# EAGLE board 10x8 (EAGLE 9.6.2), part 1 of 5

Size 99.06 x 83.82 mm. Coordinates in mm from the lower left corner, seen from the top.
Outline: 0,0 99.06,0 99.06,83.82 0,83.82 0,0
Copper layers (1*16): Top 0.035mm / dielectric 1.5mm / Bottom 0.035mm
Design rules "default": minimum track width 6mil, minimum drill 0.35mm, track to track 6mil, track to pad 6mil, pad to pad 6mil, via to via 6mil, smd to smd 6mil, copper to edge 40mil, drill to drill 6mil, minimum pad ring 10mil, minimum via ring 8mil, stop-mask expansion 4mil, vias tented up to drill 0mil, thermal gap 10mil

## Footprints (pad centres in the part's own frame; a part is rotated, then mirrored left to right if it is on the bottom)
PROTOPAD-THT = drill 0.8 pad 1.4: P1 0,0

## Placement (x,y rotation side)
U$1  [PROTOPAD-BETWEEN]  2.54,1.27 90 top
U$2  [PROTOPAD-CENTER]  3.81,1.27 0 top
U$3  [PROTOPAD-BETWEEN]  5.08,1.27 90 top
U$4  [PROTOPAD-CENTER]  6.35,1.27 0 top
U$5  PROTOPADTHT  [PROTOPAD-THT]  2.54,2.54 0 top
U$6  [PROTOPAD-BETWEEN]  3.81,2.54 0 top
U$7  [PROTOPAD-BETWEEN]  2.54,3.81 90 top
U$8  [PROTOPAD-CENTER]  3.81,3.81 0 top
U$9  PROTOPADTHT  [PROTOPAD-THT]  5.08,2.54 0 top
U$10  [PROTOPAD-BETWEEN]  6.35,2.54 0 top
U$11  [PROTOPAD-BETWEEN]  5.08,3.81 90 top
U$12  [PROTOPAD-CENTER]  6.35,3.81 0 top
U$13  PROTOPADTHT  [PROTOPAD-THT]  2.54,5.08 0 top
U$14  [PROTOPAD-BETWEEN]  3.81,5.08 0 top
U$15  [PROTOPAD-BETWEEN]  2.54,6.35 90 top
U$16  [PROTOPAD-CENTER]  3.81,6.35 0 top
U$17  PROTOPADTHT  [PROTOPAD-THT]  5.08,5.08 0 top
U$18  [PROTOPAD-BETWEEN]  6.35,5.08 0 top
U$19  [PROTOPAD-BETWEEN]  5.08,6.35 90 top
U$20  [PROTOPAD-CENTER]  6.35,6.35 0 top
U$21  [PROTOPAD-BETWEEN]  7.62,1.27 90 top
U$22  [PROTOPAD-CENTER]  8.89,1.27 0 top
U$23  [PROTOPAD-BETWEEN]  10.16,1.27 90 top
U$24  [PROTOPAD-CENTER]  11.43,1.27 0 top
U$25  [PROTOPAD-BETWEEN]  12.7,1.27 90 top
U$26  [PROTOPAD-CENTER]  13.97,1.27 0 top
U$27  [PROTOPAD-BETWEEN]  15.24,1.27 90 top
U$28  [PROTOPAD-CENTER]  16.51,1.27 0 top
U$29  [PROTOPAD-BETWEEN]  17.78,1.27 90 top
U$30  [PROTOPAD-CENTER]  19.05,1.27 0 top
U$31  [PROTOPAD-BETWEEN]  20.32,1.27 90 top
U$32  [PROTOPAD-CENTER]  21.59,1.27 0 top
U$33  PROTOPADTHT  [PROTOPAD-THT]  7.62,2.54 0 top
U$34  [PROTOPAD-BETWEEN]  8.89,2.54 0 top
U$35  [PROTOPAD-BETWEEN]  7.62,3.81 90 top
U$36  [PROTOPAD-CENTER]  8.89,3.81 0 top
U$37  PROTOPADTHT  [PROTOPAD-THT]  10.16,2.54 0 top
U$38  [PROTOPAD-BETWEEN]  11.43,2.54 0 top
U$39  [PROTOPAD-BETWEEN]  10.16,3.81 90 top
U$40  [PROTOPAD-CENTER]  11.43,3.81 0 top
U$41  PROTOPADTHT  [PROTOPAD-THT]  7.62,5.08 0 top
U$42  [PROTOPAD-BETWEEN]  8.89,5.08 0 top
U$43  [PROTOPAD-BETWEEN]  7.62,6.35 90 top
U$44  [PROTOPAD-CENTER]  8.89,6.35 0 top
U$45  PROTOPADTHT  [PROTOPAD-THT]  10.16,5.08 0 top
U$46  [PROTOPAD-BETWEEN]  11.43,5.08 0 top
U$47  [PROTOPAD-BETWEEN]  10.16,6.35 90 top
U$48  [PROTOPAD-CENTER]  11.43,6.35 0 top
U$49  PROTOPADTHT  [PROTOPAD-THT]  2.54,7.62 0 top
U$50  [PROTOPAD-BETWEEN]  3.81,7.62 0 top
U$51  [PROTOPAD-BETWEEN]  2.54,8.89 90 top
U$52  [PROTOPAD-CENTER]  3.81,8.89 0 top
U$53  PROTOPADTHT  [PROTOPAD-THT]  5.08,7.62 0 top
U$54  [PROTOPAD-BETWEEN]  6.35,7.62 0 top
U$55  [PROTOPAD-BETWEEN]  5.08,8.89 90 top
U$56  [PROTOPAD-CENTER]  6.35,8.89 0 top
U$57  PROTOPADTHT  [PROTOPAD-THT]  2.54,10.16 0 top
U$58  [PROTOPAD-BETWEEN]  3.81,10.16 0 top
U$59  [PROTOPAD-BETWEEN]  2.54,11.43 90 top
U$60  [PROTOPAD-CENTER]  3.81,11.43 0 top
U$61  PROTOPADTHT  [PROTOPAD-THT]  5.08,10.16 0 top
U$62  [PROTOPAD-BETWEEN]  6.35,10.16 0 top
U$63  [PROTOPAD-BETWEEN]  5.08,11.43 90 top
U$64  [PROTOPAD-CENTER]  6.35,11.43 0 top
U$65  PROTOPADTHT  [PROTOPAD-THT]  93.98,2.54 0 top
U$66  [PROTOPAD-BETWEEN]  95.25,2.54 0 top
U$67  [PROTOPAD-BETWEEN]  93.98,3.81 90 top
U$68  [PROTOPAD-CENTER]  95.25,3.81 0 top
U$69  PROTOPADTHT  [PROTOPAD-THT]  96.52,2.54 0 top
U$70  [PROTOPAD-BETWEEN]  97.79,2.54 0 top
U$71  [PROTOPAD-BETWEEN]  96.52,3.81 90 top
U$72  [PROTOPAD-CENTER]  97.79,3.81 0 top
U$73  PROTOPADTHT  [PROTOPAD-THT]  93.98,5.08 0 top
U$74  [PROTOPAD-BETWEEN]  95.25,5.08 0 top
U$75  [PROTOPAD-BETWEEN]  93.98,6.35 90 top
U$76  [PROTOPAD-CENTER]  95.25,6.35 0 top
U$77  PROTOPADTHT  [PROTOPAD-THT]  96.52,5.08 0 top
U$78  [PROTOPAD-BETWEEN]  97.79,5.08 0 top
U$79  [PROTOPAD-BETWEEN]  96.52,6.35 90 top
U$80  [PROTOPAD-CENTER]  97.79,6.35 0 top
U$81  PROTOPADTHT  [PROTOPAD-THT]  7.62,7.62 0 top
U$82  [PROTOPAD-BETWEEN]  8.89,7.62 0 top
U$83  [PROTOPAD-BETWEEN]  7.62,8.89 90 top
U$84  [PROTOPAD-CENTER]  8.89,8.89 0 top
U$85  PROTOPADTHT  [PROTOPAD-THT]  10.16,7.62 0 top
U$86  [PROTOPAD-BETWEEN]  11.43,7.62 0 top
U$87  [PROTOPAD-BETWEEN]  10.16,8.89 90 top
U$88  [PROTOPAD-CENTER]  11.43,8.89 0 top
U$89  PROTOPADTHT  [PROTOPAD-THT]  7.62,10.16 0 top
U$90  [PROTOPAD-BETWEEN]  8.89,10.16 0 top
U$91  [PROTOPAD-BETWEEN]  7.62,11.43 90 top
U$92  [PROTOPAD-CENTER]  8.89,11.43 0 top
U$93  PROTOPADTHT  [PROTOPAD-THT]  10.16,10.16 0 top
U$94  [PROTOPAD-BETWEEN]  11.43,10.16 0 top
U$95  [PROTOPAD-BETWEEN]  10.16,11.43 90 top
U$96  [PROTOPAD-CENTER]  11.43,11.43 0 top
U$97  [PROTOPAD-BETWEEN]  22.86,1.27 90 top
U$98  [PROTOPAD-CENTER]  24.13,1.27 0 top
U$99  [PROTOPAD-BETWEEN]  25.4,1.27 90 top
U$100  [PROTOPAD-CENTER]  26.67,1.27 0 top
U$101  [PROTOPAD-BETWEEN]  27.94,1.27 90 top
U$102  [PROTOPAD-CENTER]  29.21,1.27 0 top
U$103  [PROTOPAD-BETWEEN]  30.48,1.27 90 top
U$104  [PROTOPAD-CENTER]  31.75,1.27 0 top
U$105  [PROTOPAD-BETWEEN]  33.02,1.27 90 top
U$106  [PROTOPAD-CENTER]  34.29,1.27 0 top
U$107  [PROTOPAD-BETWEEN]  35.56,1.27 90 top
U$108  [PROTOPAD-CENTER]  36.83,1.27 0 top
U$109  [PROTOPAD-BETWEEN]  38.1,1.27 90 top
U$110  [PROTOPAD-CENTER]  39.37,1.27 0 top
U$111  [PROTOPAD-BETWEEN]  40.64,1.27 90 top
U$112  [PROTOPAD-CENTER]  41.91,1.27 0 top
U$113  [PROTOPAD-BETWEEN]  43.18,1.27 90 top
U$114  [PROTOPAD-CENTER]  44.45,1.27 0 top
U$115  [PROTOPAD-BETWEEN]  45.72,1.27 90 top
U$116  [PROTOPAD-CENTER]  46.99,1.27 0 top
U$117  [PROTOPAD-BETWEEN]  48.26,1.27 90 top
U$118  [PROTOPAD-CENTER]  49.53,1.27 0 top
U$119  [PROTOPAD-BETWEEN]  50.8,1.27 90 top
U$120  [PROTOPAD-CENTER]  52.07,1.27 0 top
U$121  [PROTOPAD-BETWEEN]  53.34,1.27 90 top
U$122  [PROTOPAD-CENTER]  54.61,1.27 0 top
U$123  [PROTOPAD-BETWEEN]  55.88,1.27 90 top
U$124  [PROTOPAD-CENTER]  57.15,1.27 0 top
U$125  [PROTOPAD-BETWEEN]  58.42,1.27 90 top
U$126  [PROTOPAD-CENTER]  59.69,1.27 0 top
U$127  [PROTOPAD-BETWEEN]  60.96,1.27 90 top
U$128  [PROTOPAD-CENTER]  62.23,1.27 0 top
U$129  PROTOPADTHT  [PROTOPAD-THT]  12.7,2.54 0 top
U$130  [PROTOPAD-BETWEEN]  13.97,2.54 0 top
U$131  [PROTOPAD-BETWEEN]  12.7,3.81 90 top
U$132  [PROTOPAD-CENTER]  13.97,3.81 0 top
U$133  PROTOPADTHT  [PROTOPAD-THT]  15.24,2.54 0 top
U$134  [PROTOPAD-BETWEEN]  16.51,2.54 0 top
U$135  [PROTOPAD-BETWEEN]  15.24,3.81 90 top
U$136  [PROTOPAD-CENTER]  16.51,3.81 0 top
U$137  PROTOPADTHT  [PROTOPAD-THT]  12.7,5.08 0 top
U$138  [PROTOPAD-BETWEEN]  13.97,5.08 0 top
U$139  [PROTOPAD-BETWEEN]  12.7,6.35 90 top
U$140  [PROTOPAD-CENTER]  13.97,6.35 0 top
U$141  PROTOPADTHT  [PROTOPAD-THT]  15.24,5.08 0 top
U$142  [PROTOPAD-BETWEEN]  16.51,5.08 0 top
U$143  [PROTOPAD-BETWEEN]  15.24,6.35 90 top
U$144  [PROTOPAD-CENTER]  16.51,6.35 0 top
U$145  PROTOPADTHT  [PROTOPAD-THT]  17.78,2.54 0 top
U$146  [PROTOPAD-BETWEEN]  19.05,2.54 0 top
U$147  [PROTOPAD-BETWEEN]  17.78,3.81 90 top
U$148  [PROTOPAD-CENTER]  19.05,3.81 0 top
U$149  PROTOPADTHT  [PROTOPAD-THT]  20.32,2.54 0 top
U$150  [PROTOPAD-BETWEEN]  21.59,2.54 0 top
U$151  [PROTOPAD-BETWEEN]  20.32,3.81 90 top
U$152  [PROTOPAD-CENTER]  21.59,3.81 0 top
U$153  PROTOPADTHT  [PROTOPAD-THT]  17.78,5.08 0 top
U$154  [PROTOPAD-BETWEEN]  19.05,5.08 0 top
U$155  [PROTOPAD-BETWEEN]  17.78,6.35 90 top
U$156  [PROTOPAD-CENTER]  19.05,6.35 0 top
U$157  PROTOPADTHT  [PROTOPAD-THT]  20.32,5.08 0 top
U$158  [PROTOPAD-BETWEEN]  21.59,5.08 0 top
U$159  [PROTOPAD-BETWEEN]  20.32,6.35 90 top
U$160  [PROTOPAD-CENTER]  21.59,6.35 0 top
U$161  PROTOPADTHT  [PROTOPAD-THT]  12.7,7.62 0 top
U$162  [PROTOPAD-BETWEEN]  13.97,7.62 0 top
U$163  [PROTOPAD-BETWEEN]  12.7,8.89 90 top
U$164  [PROTOPAD-CENTER]  13.97,8.89 0 top
U$165  PROTOPADTHT  [PROTOPAD-THT]  15.24,7.62 0 top
U$166  [PROTOPAD-BETWEEN]  16.51,7.62 0 top
U$167  [PROTOPAD-BETWEEN]  15.24,8.89 90 top
U$168  [PROTOPAD-CENTER]  16.51,8.89 0 top
U$169  PROTOPADTHT  [PROTOPAD-THT]  12.7,10.16 0 top
U$170  [PROTOPAD-BETWEEN]  13.97,10.16 0 top
U$171  [PROTOPAD-BETWEEN]  12.7,11.43 90 top
U$172  [PROTOPAD-CENTER]  13.97,11.43 0 top
U$173  PROTOPADTHT  [PROTOPAD-THT]  15.24,10.16 0 top
U$174  [PROTOPAD-BETWEEN]  16.51,10.16 0 top
U$175  [PROTOPAD-BETWEEN]  15.24,11.43 90 top
U$176  [PROTOPAD-CENTER]  16.51,11.43 0 top
U$177  PROTOPADTHT  [PROTOPAD-THT]  17.78,7.62 0 top
U$178  [PROTOPAD-BETWEEN]  19.05,7.62 0 top
U$179  [PROTOPAD-BETWEEN]  17.78,8.89 90 top
U$180  [PROTOPAD-CENTER]  19.05,8.89 0 top
U$181  PROTOPADTHT  [PROTOPAD-THT]  20.32,7.62 0 top
U$182  [PROTOPAD-BETWEEN]  21.59,7.62 0 top
U$183  [PROTOPAD-BETWEEN]  20.32,8.89 90 top
U$184  [PROTOPAD-CENTER]  21.59,8.89 0 top
U$185  PROTOPADTHT  [PROTOPAD-THT]  17.78,10.16 0 top
U$186  [PROTOPAD-BETWEEN]  19.05,10.16 0 top
U$187  [PROTOPAD-BETWEEN]  17.78,11.43 90 top
U$188  [PROTOPAD-CENTER]  19.05,11.43 0 top
U$189  PROTOPADTHT  [PROTOPAD-THT]  20.32,10.16 0 top
U$190  [PROTOPAD-BETWEEN]  21.59,10.16 0 top
U$191  [PROTOPAD-BETWEEN]  20.32,11.43 90 top
U$192  [PROTOPAD-CENTER]  21.59,11.43 0 top
U$193  PROTOPADTHT  [PROTOPAD-THT]  2.54,12.7 0 top
U$194  [PROTOPAD-BETWEEN]  3.81,12.7 0 top
U$195  [PROTOPAD-BETWEEN]  2.54,13.97 90 top
U$196  [PROTOPAD-CENTER]  3.81,13.97 0 top
U$197  PROTOPADTHT  [PROTOPAD-THT]  5.08,12.7 0 top
U$198  [PROTOPAD-BETWEEN]  6.35,12.7 0 top
U$199  [PROTOPAD-BETWEEN]  5.08,13.97 90 top
U$200  [PROTOPAD-CENTER]  6.35,13.97 0 top
U$201  PROTOPADTHT  [PROTOPAD-THT]  2.54,15.24 0 top
U$202  [PROTOPAD-BETWEEN]  3.81,15.24 0 top
U$203  [PROTOPAD-BETWEEN]  2.54,16.51 90 top
U$204  [PROTOPAD-CENTER]  3.81,16.51 0 top
U$205  PROTOPADTHT  [PROTOPAD-THT]  5.08,15.24 0 top
U$206  [PROTOPAD-BETWEEN]  6.35,15.24 0 top
U$207  [PROTOPAD-BETWEEN]  5.08,16.51 90 top
U$208  [PROTOPAD-CENTER]  6.35,16.51 0 top
U$209  PROTOPADTHT  [PROTOPAD-THT]  7.62,12.7 0 top
U$210  [PROTOPAD-BETWEEN]  8.89,12.7 0 top
U$211  [PROTOPAD-BETWEEN]  7.62,13.97 90 top
U$212  [PROTOPAD-CENTER]  8.89,13.97 0 top
U$213  PROTOPADTHT  [PROTOPAD-THT]  10.16,12.7 0 top
U$214  [PROTOPAD-BETWEEN]  11.43,12.7 0 top
U$215  [PROTOPAD-BETWEEN]  10.16,13.97 90 top
U$216  [PROTOPAD-CENTER]  11.43,13.97 0 top
U$217  PROTOPADTHT  [PROTOPAD-THT]  7.62,15.24 0 top
U$218  [PROTOPAD-BETWEEN]  8.89,15.24 0 top
U$219  [PROTOPAD-BETWEEN]  7.62,16.51 90 top
U$220  [PROTOPAD-CENTER]  8.89,16.51 0 top
U$221  PROTOPADTHT  [PROTOPAD-THT]  10.16,15.24 0 top
U$222  [PROTOPAD-BETWEEN]  11.43,15.24 0 top
U$223  [PROTOPAD-BETWEEN]  10.16,16.51 90 top
U$224  [PROTOPAD-CENTER]  11.43,16.51 0 top
U$225  PROTOPADTHT  [PROTOPAD-THT]  2.54,17.78 0 top
U$226  [PROTOPAD-BETWEEN]  3.81,17.78 0 top
U$227  [PROTOPAD-BETWEEN]  2.54,19.05 90 top
U$228  [PROTOPAD-CENTER]  3.81,19.05 0 top
U$229  PROTOPADTHT  [PROTOPAD-THT]  5.08,17.78 0 top
U$230  [PROTOPAD-BETWEEN]  6.35,17.78 0 top
U$231  [PROTOPAD-BETWEEN]  5.08,19.05 90 top
U$232  [PROTOPAD-CENTER]  6.35,19.05 0 top
U$233  PROTOPADTHT  [PROTOPAD-THT]  2.54,20.32 0 top
U$234  [PROTOPAD-BETWEEN]  3.81,20.32 0 top
U$235  [PROTOPAD-BETWEEN]  2.54,21.59 90 top
U$236  [PROTOPAD-CENTER]  3.81,21.59 0 top
U$237  PROTOPADTHT  [PROTOPAD-THT]  5.08,20.32 0 top
U$238  [PROTOPAD-BETWEEN]  6.35,20.32 0 top
U$239  [PROTOPAD-BETWEEN]  5.08,21.59 90 top
U$240  [PROTOPAD-CENTER]  6.35,21.59 0 top
U$241  PROTOPADTHT  [PROTOPAD-THT]  7.62,17.78 0 top
U$242  [PROTOPAD-BETWEEN]  8.89,17.78 0 top
U$243  [PROTOPAD-BETWEEN]  7.62,19.05 90 top
U$244  [PROTOPAD-CENTER]  8.89,19.05 0 top
U$245  PROTOPADTHT  [PROTOPAD-THT]  10.16,17.78 0 top
U$246  [PROTOPAD-BETWEEN]  11.43,17.78 0 top
U$247  [PROTOPAD-BETWEEN]  10.16,19.05 90 top
U$248  [PROTOPAD-CENTER]  11.43,19.05 0 top
U$249  PROTOPADTHT  [PROTOPAD-THT]  7.62,20.32 0 top
U$250  [PROTOPAD-BETWEEN]  8.89,20.32 0 top
U$251  [PROTOPAD-BETWEEN]  7.62,21.59 90 top
U$252  [PROTOPAD-CENTER]  8.89,21.59 0 top
U$253  PROTOPADTHT  [PROTOPAD-THT]  10.16,20.32 0 top
U$254  [PROTOPAD-BETWEEN]  11.43,20.32 0 top
U$255  [PROTOPAD-BETWEEN]  10.16,21.59 90 top
U$256  [PROTOPAD-CENTER]  11.43,21.59 0 top
U$257  PROTOPADTHT  [PROTOPAD-THT]  83.82,2.54 0 top
U$258  [PROTOPAD-BETWEEN]  85.09,2.54 0 top
U$259  [PROTOPAD-BETWEEN]  83.82,3.81 90 top
U$260  [PROTOPAD-CENTER]  85.09,3.81 0 top
U$261  PROTOPADTHT  [PROTOPAD-THT]  86.36,2.54 0 top
U$262  [PROTOPAD-BETWEEN]  87.63,2.54 0 top
U$263  [PROTOPAD-BETWEEN]  86.36,3.81 90 top
U$264  [PROTOPAD-CENTER]  87.63,3.81 0 top
U$265  PROTOPADTHT  [PROTOPAD-THT]  83.82,5.08 0 top
U$266  [PROTOPAD-BETWEEN]  85.09,5.08 0 top
U$267  [PROTOPAD-BETWEEN]  83.82,6.35 90 top
U$268  [PROTOPAD-CENTER]  85.09,6.35 0 top
U$269  PROTOPADTHT  [PROTOPAD-THT]  86.36,5.08 0 top
U$270  [PROTOPAD-BETWEEN]  87.63,5.08 0 top
U$271  [PROTOPAD-BETWEEN]  86.36,6.35 90 top
U$272  [PROTOPAD-CENTER]  87.63,6.35 0 top
U$273  PROTOPADTHT  [PROTOPAD-THT]  88.9,2.54 0 top
U$274  [PROTOPAD-BETWEEN]  90.17,2.54 0 top
U$275  [PROTOPAD-BETWEEN]  88.9,3.81 90 top
U$276  [PROTOPAD-CENTER]  90.17,3.81 0 top
U$277  PROTOPADTHT  [PROTOPAD-THT]  91.44,2.54 0 top
U$278  [PROTOPAD-BETWEEN]  92.71,2.54 0 top
U$279  [PROTOPAD-BETWEEN]  91.44,3.81 90 top
U$280  [PROTOPAD-CENTER]  92.71,3.81 0 top
U$281  PROTOPADTHT  [PROTOPAD-THT]  88.9,5.08 0 top
U$282  [PROTOPAD-BETWEEN]  90.17,5.08 0 top
U$283  [PROTOPAD-BETWEEN]  88.9,6.35 90 top
U$284  [PROTOPAD-CENTER]  90.17,6.35 0 top
U$285  PROTOPADTHT  [PROTOPAD-THT]  91.44,5.08 0 top
U$286  [PROTOPAD-BETWEEN]  92.71,5.08 0 top
U$287  [PROTOPAD-BETWEEN]  91.44,6.35 90 top
U$288  [PROTOPAD-CENTER]  92.71,6.35 0 top
U$289  PROTOPADTHT  [PROTOPAD-THT]  83.82,7.62 0 top
U$290  [PROTOPAD-BETWEEN]  85.09,7.62 0 top
U$291  [PROTOPAD-BETWEEN]  83.82,8.89 90 top
U$292  [PROTOPAD-CENTER]  85.09,8.89 0 top
U$293  PROTOPADTHT  [PROTOPAD-THT]  86.36,7.62 0 top
U$294  [PROTOPAD-BETWEEN]  87.63,7.62 0 top
U$295  [PROTOPAD-BETWEEN]  86.36,8.89 90 top
U$296  [PROTOPAD-CENTER]  87.63,8.89 0 top
U$297  PROTOPADTHT  [PROTOPAD-THT]  83.82,10.16 0 top
U$298  [PROTOPAD-BETWEEN]  85.09,10.16 0 top
U$299  [PROTOPAD-BETWEEN]  83.82,11.43 90 top
U$300  [PROTOPAD-CENTER]  85.09,11.43 0 top
U$301  PROTOPADTHT  [PROTOPAD-THT]  86.36,10.16 0 top
U$302  [PROTOPAD-BETWEEN]  87.63,10.16 0 top
U$303  [PROTOPAD-BETWEEN]  86.36,11.43 90 top
U$304  [PROTOPAD-CENTER]  87.63,11.43 0 top
U$305  PROTOPADTHT  [PROTOPAD-THT]  88.9,7.62 0 top
U$306  [PROTOPAD-BETWEEN]  90.17,7.62 0 top
U$307  [PROTOPAD-BETWEEN]  88.9,8.89 90 top
U$308  [PROTOPAD-CENTER]  90.17,8.89 0 top
U$309  PROTOPADTHT  [PROTOPAD-THT]  91.44,7.62 0 top
U$310  [PROTOPAD-BETWEEN]  92.71,7.62 0 top
U$311  [PROTOPAD-BETWEEN]  91.44,8.89 90 top
U$312  [PROTOPAD-CENTER]  92.71,8.89 0 top
U$313  PROTOPADTHT  [PROTOPAD-THT]  88.9,10.16 0 top
U$314  [PROTOPAD-BETWEEN]  90.17,10.16 0 top
U$315  [PROTOPAD-BETWEEN]  88.9,11.43 90 top
U$316  [PROTOPAD-CENTER]  90.17,11.43 0 top
U$317  PROTOPADTHT  [PROTOPAD-THT]  91.44,10.16 0 top
U$318  [PROTOPAD-BETWEEN]  92.71,10.16 0 top
U$319  [PROTOPAD-BETWEEN]  91.44,11.43 90 top
U$320  [PROTOPAD-CENTER]  92.71,11.43 0 top
U$321  PROTOPADTHT  [PROTOPAD-THT]  12.7,12.7 0 top
U$322  [PROTOPAD-BETWEEN]  13.97,12.7 0 top
U$323  [PROTOPAD-BETWEEN]  12.7,13.97 90 top
U$324  [PROTOPAD-CENTER]  13.97,13.97 0 top
U$325  PROTOPADTHT  [PROTOPAD-THT]  15.24,12.7 0 top
U$326  [PROTOPAD-BETWEEN]  16.51,12.7 0 top
U$327  [PROTOPAD-BETWEEN]  15.24,13.97 90 top
U$328  [PROTOPAD-CENTER]  16.51,13.97 0 top
U$329  PROTOPADTHT  [PROTOPAD-THT]  12.7,15.24 0 top
U$330  [PROTOPAD-BETWEEN]  13.97,15.24 0 top
U$331  [PROTOPAD-BETWEEN]  12.7,16.51 90 top
U$332  [PROTOPAD-CENTER]  13.97,16.51 0 top
U$333  PROTOPADTHT  [PROTOPAD-THT]  15.24,15.24 0 top
U$334  [PROTOPAD-BETWEEN]  16.51,15.24 0 top
U$335  [PROTOPAD-BETWEEN]  15.24,16.51 90 top
U$336  [PROTOPAD-CENTER]  16.51,16.51 0 top
U$337  PROTOPADTHT  [PROTOPAD-THT]  17.78,12.7 0 top
U$338  [PROTOPAD-BETWEEN]  19.05,12.7 0 top
U$339  [PROTOPAD-BETWEEN]  17.78,13.97 90 top
U$340  [PROTOPAD-CENTER]  19.05,13.97 0 top
U$341  PROTOPADTHT  [PROTOPAD-THT]  20.32,12.7 0 top
U$342  [PROTOPAD-BETWEEN]  21.59,12.7 0 top
U$343  [PROTOPAD-BETWEEN]  20.32,13.97 90 top
U$344  [PROTOPAD-CENTER]  21.59,13.97 0 top
U$345  PROTOPADTHT  [PROTOPAD-THT]  17.78,15.24 0 top
U$346  [PROTOPAD-BETWEEN]  19.05,15.24 0 top
U$347  [PROTOPAD-BETWEEN]  17.78,16.51 90 top
U$348  [PROTOPAD-CENTER]  19.05,16.51 0 top
U$349  PROTOPADTHT  [PROTOPAD-THT]  20.32,15.24 0 top
U$350  [PROTOPAD-BETWEEN]  21.59,15.24 0 top
U$351  [PROTOPAD-BETWEEN]  20.32,16.51 90 top
U$352  [PROTOPAD-CENTER]  21.59,16.51 0 top
U$353  PROTOPADTHT  [PROTOPAD-THT]  12.7,17.78 0 top
U$354  [PROTOPAD-BETWEEN]  13.97,17.78 0 top
U$355  [PROTOPAD-BETWEEN]  12.7,19.05 90 top
U$356  [PROTOPAD-CENTER]  13.97,19.05 0 top
U$357  PROTOPADTHT  [PROTOPAD-THT]  15.24,17.78 0 top
U$358  [PROTOPAD-BETWEEN]  16.51,17.78 0 top
U$359  [PROTOPAD-BETWEEN]  15.24,19.05 90 top
U$360  [PROTOPAD-CENTER]  16.51,19.05 0 top
U$361  PROTOPADTHT  [PROTOPAD-THT]  12.7,20.32 0 top
U$362  [PROTOPAD-BETWEEN]  13.97,20.32 0 top
U$363  [PROTOPAD-BETWEEN]  12.7,21.59 90 top
U$364  [PROTOPAD-CENTER]  13.97,21.59 0 top
U$365  PROTOPADTHT  [PROTOPAD-THT]  15.24,20.32 0 top
U$366  [PROTOPAD-BETWEEN]  16.51,20.32 0 top
U$367  [PROTOPAD-BETWEEN]  15.24,21.59 90 top
U$368  [PROTOPAD-CENTER]  16.51,21.59 0 top
U$369  PROTOPADTHT  [PROTOPAD-THT]  17.78,17.78 0 top
U$370  [PROTOPAD-BETWEEN]  19.05,17.78 0 top
U$371  [PROTOPAD-BETWEEN]  17.78,19.05 90 top
U$372  [PROTOPAD-CENTER]  19.05,19.05 0 top
U$373  PROTOPADTHT  [PROTOPAD-THT]  20.32,17.78 0 top
U$374  [PROTOPAD-BETWEEN]  21.59,17.78 0 top
U$375  [PROTOPAD-BETWEEN]  20.32,19.05 90 top
U$376  [PROTOPAD-CENTER]  21.59,19.05 0 top
U$377  PROTOPADTHT  [PROTOPAD-THT]  17.78,20.32 0 top
U$378  [PROTOPAD-BETWEEN]  19.05,20.32 0 top
U$379  [PROTOPAD-BETWEEN]  17.78,21.59 90 top
U$380  [PROTOPAD-CENTER]  19.05,21.59 0 top
U$381  PROTOPADTHT  [PROTOPAD-THT]  20.32,20.32 0 top
U$382  [PROTOPAD-BETWEEN]  21.59,20.32 0 top
U$383  [PROTOPAD-BETWEEN]  20.32,21.59 90 top
U$384  [PROTOPAD-CENTER]  21.59,21.59 0 top
U$385  [PROTOPAD-BETWEEN]  63.5,1.27 90 top
U$386  [PROTOPAD-CENTER]  64.77,1.27 0 top
U$387  [PROTOPAD-BETWEEN]  66.04,1.27 90 top
U$388  [PROTOPAD-CENTER]  67.31,1.27 0 top
U$389  [PROTOPAD-BETWEEN]  68.58,1.27 90 top
U$390  [PROTOPAD-CENTER]  69.85,1.27 0 top
U$391  [PROTOPAD-BETWEEN]  71.12,1.27 90 top
U$392  [PROTOPAD-CENTER]  72.39,1.27 0 top
U$393  [PROTOPAD-BETWEEN]  73.66,1.27 90 top
U$394  [PROTOPAD-CENTER]  74.93,1.27 0 top
U$395  [PROTOPAD-BETWEEN]  76.2,1.27 90 top
U$396  [PROTOPAD-CENTER]  77.47,1.27 0 top
U$397  [PROTOPAD-BETWEEN]  78.74,1.27 90 top
U$398  [PROTOPAD-CENTER]  80.01,1.27 0 top
U$399  [PROTOPAD-BETWEEN]  81.28,1.27 90 top
U$400  [PROTOPAD-CENTER]  82.55,1.27 0 top
U$401  [PROTOPAD-BETWEEN]  83.82,1.27 90 top
U$402  [PROTOPAD-CENTER]  85.09,1.27 0 top
U$403  [PROTOPAD-BETWEEN]  86.36,1.27 90 top
U$404  [PROTOPAD-CENTER]  87.63,1.27 0 top
U$405  [PROTOPAD-BETWEEN]  88.9,1.27 90 top
U$406  [PROTOPAD-CENTER]  90.17,1.27 0 top
U$407  [PROTOPAD-BETWEEN]  91.44,1.27 90 top
U$408  [PROTOPAD-CENTER]  92.71,1.27 0 top
U$409  [PROTOPAD-BETWEEN]  93.98,1.27 90 top
U$410  [PROTOPAD-CENTER]  95.25,1.27 0 top
U$411  [PROTOPAD-BETWEEN]  96.52,1.27 90 top
U$412  [PROTOPAD-CENTER]  97.79,1.27 0 top
U$413  [PROTOPAD-BETWEEN]  1.27,2.54 0 top
U$414  [PROTOPAD-CENTER]  1.27,3.81 0 top
U$415  [PROTOPAD-BETWEEN]  1.27,5.08 0 top
U$416  [PROTOPAD-CENTER]  1.27,6.35 0 top
U$417  [PROTOPAD-BETWEEN]  1.27,7.62 0 top
U$418  [PROTOPAD-CENTER]  1.27,8.89 0 top
U$419  [PROTOPAD-BETWEEN]  1.27,10.16 0 top
U$420  [PROTOPAD-CENTER]  1.27,11.43 0 top
U$421  [PROTOPAD-BETWEEN]  1.27,12.7 0 top
U$422  [PROTOPAD-CENTER]  1.27,13.97 0 top
U$423  [PROTOPAD-BETWEEN]  1.27,15.24 0 top
U$424  [PROTOPAD-CENTER]  1.27,16.51 0 top
U$425  [PROTOPAD-BETWEEN]  1.27,17.78 0 top
U$426  [PROTOPAD-CENTER]  1.27,19.05 0 top
U$427  [PROTOPAD-BETWEEN]  1.27,20.32 0 top
U$428  [PROTOPAD-CENTER]  1.27,21.59 0 top
U$429  [PROTOPAD-BETWEEN]  1.27,22.86 0 top
U$430  [PROTOPAD-CENTER]  1.27,24.13 0 top
U$431  [PROTOPAD-BETWEEN]  1.27,25.4 0 top
U$432  [PROTOPAD-CENTER]  1.27,26.67 0 top
U$433  [PROTOPAD-BETWEEN]  1.27,27.94 0 top
U$434  [PROTOPAD-CENTER]  1.27,29.21 0 top
U$435  [PROTOPAD-BETWEEN]  1.27,30.48 0 top
U$436  [PROTOPAD-CENTER]  1.27,31.75 0 top
U$437  [PROTOPAD-BETWEEN]  1.27,33.02 0 top
U$438  [PROTOPAD-CENTER]  1.27,34.29 0 top
U$439  [PROTOPAD-BETWEEN]  1.27,35.56 0 top
U$440  [PROTOPAD-CENTER]  1.27,36.83 0 top
U$441  [PROTOPAD-BETWEEN]  1.27,38.1 0 top
U$442  [PROTOPAD-CENTER]  1.27,39.37 0 top
U$443  [PROTOPAD-BETWEEN]  1.27,40.64 0 top
U$444  [PROTOPAD-CENTER]  1.27,41.91 0 top
U$445  [PROTOPAD-BETWEEN]  1.27,43.18 0 top
U$446  [PROTOPAD-CENTER]  1.27,44.45 0 top
U$447  [PROTOPAD-BETWEEN]  1.27,45.72 0 top
U$448  [PROTOPAD-CENTER]  1.27,46.99 0 top
U$449  [PROTOPAD-BETWEEN]  1.27,48.26 0 top
U$450  [PROTOPAD-CENTER]  1.27,49.53 0 top
U$451  [PROTOPAD-BETWEEN]  1.27,50.8 0 top
U$452  [PROTOPAD-CENTER]  1.27,52.07 0 top
U$453  [PROTOPAD-BETWEEN]  1.27,53.34 0 top
U$454  [PROTOPAD-CENTER]  1.27,54.61 0 top
U$455  [PROTOPAD-BETWEEN]  1.27,55.88 0 top
U$456  [PROTOPAD-CENTER]  1.27,57.15 0 top
U$457  [PROTOPAD-BETWEEN]  1.27,58.42 0 top
U$458  [PROTOPAD-CENTER]  1.27,59.69 0 top
U$459  [PROTOPAD-BETWEEN]  1.27,60.96 0 top
U$460  [PROTOPAD-CENTER]  1.27,62.23 0 top
U$461  [PROTOPAD-CENTER]  1.27,1.27 0 top
U$462  [PROTOPAD-BETWEEN]  1.27,63.5 0 top
U$463  [PROTOPAD-CENTER]  1.27,64.77 0 top
U$464  [PROTOPAD-BETWEEN]  1.27,66.04 0 top
U$465  [PROTOPAD-CENTER]  1.27,67.31 0 top
U$466  [PROTOPAD-BETWEEN]  1.27,68.58 0 top
U$467  [PROTOPAD-CENTER]  1.27,69.85 0 top
U$468  [PROTOPAD-BETWEEN]  1.27,71.12 0 top
U$469  [PROTOPAD-CENTER]  1.27,72.39 0 top
U$470  [PROTOPAD-BETWEEN]  1.27,73.66 0 top
U$471  [PROTOPAD-CENTER]  1.27,74.93 0 top
U$472  [PROTOPAD-BETWEEN]  1.27,76.2 0 top
U$473  [PROTOPAD-CENTER]  1.27,77.47 0 top
U$474  [PROTOPAD-BETWEEN]  1.27,78.74 0 top
U$475  [PROTOPAD-CENTER]  1.27,80.01 0 top
U$476  [PROTOPAD-BETWEEN]  1.27,81.28 0 top
U$477  [PROTOPAD-CENTER]  1.27,82.55 0 top
U$494  PROTOPADTHT  [PROTOPAD-THT]  93.98,27.94 0 top
U$495  [PROTOPAD-BETWEEN]  95.25,27.94 0 top
U$496  [PROTOPAD-BETWEEN]  93.98,29.21 90 top
U$497  [PROTOPAD-CENTER]  95.25,29.21 0 top
U$498  PROTOPADTHT  [PROTOPAD-THT]  96.52,27.94 0 top
U$499  [PROTOPAD-BETWEEN]  97.79,27.94 0 top
U$500  [PROTOPAD-BETWEEN]  96.52,29.21 90 top
U$501  [PROTOPAD-CENTER]  97.79,29.21 0 top
U$502  PROTOPADTHT  [PROTOPAD-THT]  93.98,30.48 0 top
U$503  [PROTOPAD-BETWEEN]  95.25,30.48 0 top
U$504  [PROTOPAD-BETWEEN]  93.98,31.75 90 top
U$505  [PROTOPAD-CENTER]  95.25,31.75 0 top
U$506  PROTOPADTHT  [PROTOPAD-THT]  96.52,30.48 0 top
U$507  [PROTOPAD-BETWEEN]  97.79,30.48 0 top
U$508  [PROTOPAD-BETWEEN]  96.52,31.75 90 top
U$509  [PROTOPAD-CENTER]  97.79,31.75 0 top
U$510  PROTOPADTHT  [PROTOPAD-THT]  93.98,33.02 0 top
U$511  [PROTOPAD-BETWEEN]  95.25,33.02 0 top
U$512  [PROTOPAD-BETWEEN]  93.98,34.29 90 top
U$513  PROTOPADTHT  [PROTOPAD-THT]  22.86,2.54 0 top
U$514  [PROTOPAD-BETWEEN]  24.13,2.54 0 top
U$515  [PROTOPAD-BETWEEN]  22.86,3.81 90 top
U$516  [PROTOPAD-CENTER]  24.13,3.81 0 top
U$517  PROTOPADTHT  [PROTOPAD-THT]  25.4,2.54 0 top
U$518  [PROTOPAD-BETWEEN]  26.67,2.54 0 top
U$519  [PROTOPAD-BETWEEN]  25.4,3.81 90 top
U$520  [PROTOPAD-CENTER]  26.67,3.81 0 top
U$521  PROTOPADTHT  [PROTOPAD-THT]  22.86,5.08 0 top
U$522  [PROTOPAD-BETWEEN]  24.13,5.08 0 top
U$523  [PROTOPAD-BETWEEN]  22.86,6.35 90 top
U$524  [PROTOPAD-CENTER]  24.13,6.35 0 top
U$525  PROTOPADTHT  [PROTOPAD-THT]  25.4,5.08 0 top
U$526  [PROTOPAD-BETWEEN]  26.67,5.08 0 top
U$527  [PROTOPAD-BETWEEN]  25.4,6.35 90 top
U$528  [PROTOPAD-CENTER]  26.67,6.35 0 top
U$529  PROTOPADTHT  [PROTOPAD-THT]  27.94,2.54 0 top
U$530  [PROTOPAD-BETWEEN]  29.21,2.54 0 top
U$531  [PROTOPAD-BETWEEN]  27.94,3.81 90 top
U$532  [PROTOPAD-CENTER]  29.21,3.81 0 top
U$533  PROTOPADTHT  [PROTOPAD-THT]  30.48,2.54 0 top
U$534  [PROTOPAD-BETWEEN]  31.75,2.54 0 top
U$535  [PROTOPAD-BETWEEN]  30.48,3.81 90 top
U$536  [PROTOPAD-CENTER]  31.75,3.81 0 top
U$537  PROTOPADTHT  [PROTOPAD-THT]  27.94,5.08 0 top
U$538  [PROTOPAD-BETWEEN]  29.21,5.08 0 top
U$539  [PROTOPAD-BETWEEN]  27.94,6.35 90 top
U$540  [PROTOPAD-CENTER]  29.21,6.35 0 top
U$541  PROTOPADTHT  [PROTOPAD-THT]  30.48,5.08 0 top
U$542  [PROTOPAD-BETWEEN]  31.75,5.08 0 top
U$543  [PROTOPAD-BETWEEN]  30.48,6.35 90 top
U$544  [PROTOPAD-CENTER]  31.75,6.35 0 top
U$545  PROTOPADTHT  [PROTOPAD-THT]  22.86,7.62 0 top
U$546  [PROTOPAD-BETWEEN]  24.13,7.62 0 top
U$547  [PROTOPAD-BETWEEN]  22.86,8.89 90 top
U$548  [PROTOPAD-CENTER]  24.13,8.89 0 top
U$549  PROTOPADTHT  [PROTOPAD-THT]  25.4,7.62 0 top
U$550  [PROTOPAD-BETWEEN]  26.67,7.62 0 top
U$551  [PROTOPAD-BETWEEN]  25.4,8.89 90 top
U$552  [PROTOPAD-CENTER]  26.67,8.89 0 top
U$553  PROTOPADTHT  [PROTOPAD-THT]  22.86,10.16 0 top
U$554  [PROTOPAD-BETWEEN]  24.13,10.16 0 top
U$555  [PROTOPAD-BETWEEN]  22.86,11.43 90 top
U$556  [PROTOPAD-CENTER]  24.13,11.43 0 top
U$557  PROTOPADTHT  [PROTOPAD-THT]  25.4,10.16 0 top
U$558  [PROTOPAD-BETWEEN]  26.67,10.16 0 top
U$559  [PROTOPAD-BETWEEN]  25.4,11.43 90 top
U$560  [PROTOPAD-CENTER]  26.67,11.43 0 top
U$561  PROTOPADTHT  [PROTOPAD-THT]  27.94,7.62 0 top
U$562  [PROTOPAD-BETWEEN]  29.21,7.62 0 top
U$563  [PROTOPAD-BETWEEN]  27.94,8.89 90 top
U$564  [PROTOPAD-CENTER]  29.21,8.89 0 top
U$565  PROTOPADTHT  [PROTOPAD-THT]  30.48,7.62 0 top
U$566  [PROTOPAD-BETWEEN]  31.75,7.62 0 top
U$567  [PROTOPAD-BETWEEN]  30.48,8.89 90 top
U$568  [PROTOPAD-CENTER]  31.75,8.89 0 top
U$569  PROTOPADTHT  [PROTOPAD-THT]  27.94,10.16 0 top
U$570  [PROTOPAD-BETWEEN]  29.21,10.16 0 top
U$571  [PROTOPAD-BETWEEN]  27.94,11.43 90 top
U$572  [PROTOPAD-CENTER]  29.21,11.43 0 top
U$573  PROTOPADTHT  [PROTOPAD-THT]  30.48,10.16 0 top
U$574  [PROTOPAD-BETWEEN]  31.75,10.16 0 top
U$575  [PROTOPAD-BETWEEN]  30.48,11.43 90 top
U$576  [PROTOPAD-CENTER]  31.75,11.43 0 top
U$577  PROTOPADTHT  [PROTOPAD-THT]  33.02,2.54 0 top
U$578  [PROTOPAD-BETWEEN]  34.29,2.54 0 top
U$579  [PROTOPAD-BETWEEN]  33.02,3.81 90 top
U$580  [PROTOPAD-CENTER]  34.29,3.81 0 top
U$581  PROTOPADTHT  [PROTOPAD-THT]  35.56,2.54 0 top
U$582  [PROTOPAD-BETWEEN]  36.83,2.54 0 top
U$583  [PROTOPAD-BETWEEN]  35.56,3.81 90 top
U$584  [PROTOPAD-CENTER]  36.83,3.81 0 top
U$585  PROTOPADTHT  [PROTOPAD-THT]  33.02,5.08 0 top
U$586  [PROTOPAD-BETWEEN]  34.29,5.08 0 top
U$587  [PROTOPAD-BETWEEN]  33.02,6.35 90 top
U$588  [PROTOPAD-CENTER]  34.29,6.35 0 top
U$589  PROTOPADTHT  [PROTOPAD-THT]  35.56,5.08 0 top
U$590  [PROTOPAD-BETWEEN]  36.83,5.08 0 top
U$591  [PROTOPAD-BETWEEN]  35.56,6.35 90 top
U$592  [PROTOPAD-CENTER]  36.83,6.35 0 top
U$593  PROTOPADTHT  [PROTOPAD-THT]  38.1,2.54 0 top
U$594  [PROTOPAD-BETWEEN]  39.37,2.54 0 top
U$595  [PROTOPAD-BETWEEN]  38.1,3.81 90 top
U$596  [PROTOPAD-CENTER]  39.37,3.81 0 top
U$597  PROTOPADTHT  [PROTOPAD-THT]  40.64,2.54 0 top
U$598  [PROTOPAD-BETWEEN]  41.91,2.54 0 top
U$599  [PROTOPAD-BETWEEN]  40.64,3.81 90 top
U$600  [PROTOPAD-CENTER]  41.91,3.81 0 top
U$601  PROTOPADTHT  [PROTOPAD-THT]  38.1,5.08 0 top
U$602  [PROTOPAD-BETWEEN]  39.37,5.08 0 top
U$603  [PROTOPAD-BETWEEN]  38.1,6.35 90 top
U$604  [PROTOPAD-CENTER]  39.37,6.35 0 top
U$605  PROTOPADTHT  [PROTOPAD-THT]  40.64,5.08 0 top
U$606  [PROTOPAD-BETWEEN]  41.91,5.08 0 top
U$607  [PROTOPAD-BETWEEN]  40.64,6.35 90 top
U$608  [PROTOPAD-CENTER]  41.91,6.35 0 top
U$609  PROTOPADTHT  [PROTOPAD-THT]  33.02,7.62 0 top
U$610  [PROTOPAD-BETWEEN]  34.29,7.62 0 top
U$611  [PROTOPAD-BETWEEN]  33.02,8.89 90 top
U$612  [PROTOPAD-CENTER]  34.29,8.89 0 top
U$613  PROTOPADTHT  [PROTOPAD-THT]  35.56,7.62 0 top
U$614  [PROTOPAD-BETWEEN]  36.83,7.62 0 top
U$615  [PROTOPAD-BETWEEN]  35.56,8.89 90 top
U$616  [PROTOPAD-CENTER]  36.83,8.89 0 top
U$617  PROTOPADTHT  [PROTOPAD-THT]  33.02,10.16 0 top
U$618  [PROTOPAD-BETWEEN]  34.29,10.16 0 top
U$619  [PROTOPAD-BETWEEN]  33.02,11.43 90 top
U$620  [PROTOPAD-CENTER]  34.29,11.43 0 top
U$621  PROTOPADTHT  [PROTOPAD-THT]  35.56,10.16 0 top
U$622  [PROTOPAD-BETWEEN]  36.83,10.16 0 top
U$623  [PROTOPAD-BETWEEN]  35.56,11.43 90 top
U$624  [PROTOPAD-CENTER]  36.83,11.43 0 top
U$625  PROTOPADTHT  [PROTOPAD-THT]  38.1,7.62 0 top
U$626  [PROTOPAD-BETWEEN]  39.37,7.62 0 top
U$627  [PROTOPAD-BETWEEN]  38.1,8.89 90 top
U$628  [PROTOPAD-CENTER]  39.37,8.89 0 top
U$629  PROTOPADTHT  [PROTOPAD-THT]  40.64,7.62 0 top
U$630  [PROTOPAD-BETWEEN]  41.91,7.62 0 top
U$631  [PROTOPAD-BETWEEN]  40.64,8.89 90 top
U$632  [PROTOPAD-CENTER]  41.91,8.89 0 top
U$633  PROTOPADTHT  [PROTOPAD-THT]  38.1,10.16 0 top
U$634  [PROTOPAD-BETWEEN]  39.37,10.16 0 top
U$635  [PROTOPAD-BETWEEN]  38.1,11.43 90 top
U$636  [PROTOPAD-CENTER]  39.37,11.43 0 top
U$637  PROTOPADTHT  [PROTOPAD-THT]  40.64,10.16 0 top
U$638  [PROTOPAD-BETWEEN]  41.91,10.16 0 top
U$639  [PROTOPAD-BETWEEN]  40.64,11.43 90 top
U$640  [PROTOPAD-CENTER]  41.91,11.43 0 top
U$641  PROTOPADTHT  [PROTOPAD-THT]  22.86,12.7 0 top
U$642  [PROTOPAD-BETWEEN]  24.13,12.7 0 top
U$643  [PROTOPAD-BETWEEN]  22.86,13.97 90 top
U$644  [PROTOPAD-CENTER]  24.13,13.97 0 top
U$645  PROTOPADTHT  [PROTOPAD-THT]  25.4,12.7 0 top
U$646  [PROTOPAD-BETWEEN]  26.67,12.7 0 top
U$647  [PROTOPAD-BETWEEN]  25.4,13.97 90 top
U$648  [PROTOPAD-CENTER]  26.67,13.97 0 top
U$649  PROTOPADTHT  [PROTOPAD-THT]  22.86,15.24 0 top
U$650  [PROTOPAD-BETWEEN]  24.13,15.24 0 top
U$651  [PROTOPAD-BETWEEN]  22.86,16.51 90 top
U$652  [PROTOPAD-CENTER]  24.13,16.51 0 top
U$653  PROTOPADTHT  [PROTOPAD-THT]  25.4,15.24 0 top
U$654  [PROTOPAD-BETWEEN]  26.67,15.24 0 top
U$655  [PROTOPAD-BETWEEN]  25.4,16.51 90 top
U$656  [PROTOPAD-CENTER]  26.67,16.51 0 top
U$657  PROTOPADTHT  [PROTOPAD-THT]  27.94,12.7 0 top
U$658  [PROTOPAD-BETWEEN]  29.21,12.7 0 top
U$659  [PROTOPAD-BETWEEN]  27.94,13.97 90 top
U$660  [PROTOPAD-CENTER]  29.21,13.97 0 top
U$661  PROTOPADTHT  [PROTOPAD-THT]  30.48,12.7 0 top
U$662  [PROTOPAD-BETWEEN]  31.75,12.7 0 top
U$663  [PROTOPAD-BETWEEN]  30.48,13.97 90 top
U$664  [PROTOPAD-CENTER]  31.75,13.97 0 top
U$665  PROTOPADTHT  [PROTOPAD-THT]  27.94,15.24 0 top
U$666  [PROTOPAD-BETWEEN]  29.21,15.24 0 top
U$667  [PROTOPAD-BETWEEN]  27.94,16.51 90 top
U$668  [PROTOPAD-CENTER]  29.21,16.51 0 top
U$669  PROTOPADTHT  [PROTOPAD-THT]  30.48,15.24 0 top
U$670  [PROTOPAD-BETWEEN]  31.75,15.24 0 top
U$671  [PROTOPAD-BETWEEN]  30.48,16.51 90 top
U$672  [PROTOPAD-CENTER]  31.75,16.51 0 top
U$673  PROTOPADTHT  [PROTOPAD-THT]  22.86,17.78 0 top
U$674  [PROTOPAD-BETWEEN]  24.13,17.78 0 top
U$675  [PROTOPAD-BETWEEN]  22.86,19.05 90 top
U$676  [PROTOPAD-CENTER]  24.13,19.05 0 top
U$677  PROTOPADTHT  [PROTOPAD-THT]  25.4,17.78 0 top
U$678  [PROTOPAD-BETWEEN]  26.67,17.78 0 top
U$679  [PROTOPAD-BETWEEN]  25.4,19.05 90 top
U$680  [PROTOPAD-CENTER]  26.67,19.05 0 top
U$681  PROTOPADTHT  [PROTOPAD-THT]  22.86,20.32 0 top
U$682  [PROTOPAD-BETWEEN]  24.13,20.32 0 top
U$683  [PROTOPAD-BETWEEN]  22.86,21.59 90 top
U$684  [PROTOPAD-CENTER]  24.13,21.59 0 top
U$685  PROTOPADTHT  [PROTOPAD-THT]  25.4,20.32 0 top
U$686  [PROTOPAD-BETWEEN]  26.67,20.32 0 top
U$687  [PROTOPAD-BETWEEN]  25.4,21.59 90 top
U$688  [PROTOPAD-CENTER]  26.67,21.59 0 top
U$689  PROTOPADTHT  [PROTOPAD-THT]  27.94,17.78 0 top
U$690  [PROTOPAD-BETWEEN]  29.21,17.78 0 top
U$691  [PROTOPAD-BETWEEN]  27.94,19.05 90 top
U$692  [PROTOPAD-CENTER]  29.21,19.05 0 top
U$693  PROTOPADTHT  [PROTOPAD-THT]  30.48,17.78 0 top
U$694  [PROTOPAD-BETWEEN]  31.75,17.78 0 top
U$695  [PROTOPAD-BETWEEN]  30.48,19.05 90 top
U$696  [PROTOPAD-CENTER]  31.75,19.05 0 top
U$697  PROTOPADTHT  [PROTOPAD-THT]  27.94,20.32 0 top
U$698  [PROTOPAD-BETWEEN]  29.21,20.32 0 top
U$699  [PROTOPAD-BETWEEN]  27.94,21.59 90 top
U$700  [PROTOPAD-CENTER]  29.21,21.59 0 top
U$701  PROTOPADTHT  [PROTOPAD-THT]  30.48,20.32 0 top
U$702  [PROTOPAD-BETWEEN]  31.75,20.32 0 top
U$703  [PROTOPAD-BETWEEN]  30.48,21.59 90 top
U$704  [PROTOPAD-CENTER]  31.75,21.59 0 top
U$705  PROTOPADTHT  [PROTOPAD-THT]  33.02,12.7 0 top
U$706  [PROTOPAD-BETWEEN]  34.29,12.7 0 top
U$707  [PROTOPAD-BETWEEN]  33.02,13.97 90 top
U$708  [PROTOPAD-CENTER]  34.29,13.97 0 top
U$709  PROTOPADTHT  [PROTOPAD-THT]  35.56,12.7 0 top
U$710  [PROTOPAD-BETWEEN]  36.83,12.7 0 top
U$711  [PROTOPAD-BETWEEN]  35.56,13.97 90 top
U$712  [PROTOPAD-CENTER]  36.83,13.97 0 top
U$713  PROTOPADTHT  [PROTOPAD-THT]  33.02,15.24 0 top
U$714  [PROTOPAD-BETWEEN]  34.29,15.24 0 top
U$715  [PROTOPAD-BETWEEN]  33.02,16.51 90 top
U$716  [PROTOPAD-CENTER]  34.29,16.51 0 top
U$717  PROTOPADTHT  [PROTOPAD-THT]  35.56,15.24 0 top
U$718  [PROTOPAD-BETWEEN]  36.83,15.24 0 top
U$719  [PROTOPAD-BETWEEN]  35.56,16.51 90 top
U$720  [PROTOPAD-CENTER]  36.83,16.51 0 top
U$721  PROTOPADTHT  [PROTOPAD-THT]  38.1,12.7 0 top
U$722  [PROTOPAD-BETWEEN]  39.37,12.7 0 top
U$723  [PROTOPAD-BETWEEN]  38.1,13.97 90 top
U$724  [PROTOPAD-CENTER]  39.37,13.97 0 top
U$725  PROTOPADTHT  [PROTOPAD-THT]  40.64,12.7 0 top
U$726  [PROTOPAD-BETWEEN]  41.91,12.7 0 top
U$727  [PROTOPAD-BETWEEN]  40.64,13.97 90 top
U$728  [PROTOPAD-CENTER]  41.91,13.97 0 top
U$729  PROTOPADTHT  [PROTOPAD-THT]  38.1,15.24 0 top
U$730  [PROTOPAD-BETWEEN]  39.37,15.24 0 top
U$731  [PROTOPAD-BETWEEN]  38.1,16.51 90 top
U$732  [PROTOPAD-CENTER]  39.37,16.51 0 top
U$733  PROTOPADTHT  [PROTOPAD-THT]  40.64,15.24 0 top
U$734  [PROTOPAD-BETWEEN]  41.91,15.24 0 top
U$735  [PROTOPAD-BETWEEN]  40.64,16.51 90 top
U$736  [PROTOPAD-CENTER]  41.91,16.51 0 top
U$737  PROTOPADTHT  [PROTOPAD-THT]  33.02,17.78 0 top
U$738  [PROTOPAD-BETWEEN]  34.29,17.78 0 top
U$739  [PROTOPAD-BETWEEN]  33.02,19.05 90 top
U$740  [PROTOPAD-CENTER]  34.29,19.05 0 top
U$741  PROTOPADTHT  [PROTOPAD-THT]  35.56,17.78 0 top
U$742  [PROTOPAD-BETWEEN]  36.83,17.78 0 top
U$743  [PROTOPAD-BETWEEN]  35.56,19.05 90 top
U$744  [PROTOPAD-CENTER]  36.83,19.05 0 top
U$745  PROTOPADTHT  [PROTOPAD-THT]  33.02,20.32 0 top
U$746  [PROTOPAD-BETWEEN]  34.29,20.32 0 top
U$747  [PROTOPAD-BETWEEN]  33.02,21.59 90 top
U$748  [PROTOPAD-CENTER]  34.29,21.59 0 top
U$749  PROTOPADTHT  [PROTOPAD-THT]  35.56,20.32 0 top
U$750  [PROTOPAD-BETWEEN]  36.83,20.32 0 top
U$751  [PROTOPAD-BETWEEN]  35.56,21.59 90 top
U$752  [PROTOPAD-CENTER]  36.83,21.59 0 top
U$753  PROTOPADTHT  [PROTOPAD-THT]  38.1,17.78 0 top
U$754  [PROTOPAD-BETWEEN]  39.37,17.78 0 top
U$755  [PROTOPAD-BETWEEN]  38.1,19.05 90 top
U$756  [PROTOPAD-CENTER]  39.37,19.05 0 top
U$757  PROTOPADTHT  [PROTOPAD-THT]  40.64,17.78 0 top
U$758  [PROTOPAD-BETWEEN]  41.91,17.78 0 top
U$759  [PROTOPAD-BETWEEN]  40.64,19.05 90 top
U$760  [PROTOPAD-CENTER]  41.91,19.05 0 top
U$761  PROTOPADTHT  [PROTOPAD-THT]  38.1,20.32 0 top
U$762  [PROTOPAD-BETWEEN]  39.37,20.32 0 top
U$763  [PROTOPAD-BETWEEN]  38.1,21.59 90 top
U$764  [PROTOPAD-CENTER]  39.37,21.59 0 top
U$765  PROTOPADTHT  [PROTOPAD-THT]  40.64,20.32 0 top
U$766  [PROTOPAD-BETWEEN]  41.91,20.32 0 top
U$767  [PROTOPAD-BETWEEN]  40.64,21.59 90 top
U$768  [PROTOPAD-CENTER]  41.91,21.59 0 top
U$769  PROTOPADTHT  [PROTOPAD-THT]  43.18,2.54 0 top
U$770  [PROTOPAD-BETWEEN]  44.45,2.54 0 top
U$771  [PROTOPAD-BETWEEN]  43.18,3.81 90 top
U$772  [PROTOPAD-CENTER]  44.45,3.81 0 top
U$773  PROTOPADTHT  [PROTOPAD-THT]  45.72,2.54 0 top
U$774  [PROTOPAD-BETWEEN]  46.99,2.54 0 top
U$775  [PROTOPAD-BETWEEN]  45.72,3.81 90 top
U$776  [PROTOPAD-CENTER]  46.99,3.81 0 top
U$777  PROTOPADTHT  [PROTOPAD-THT]  43.18,5.08 0 top
U$778  [PROTOPAD-BETWEEN]  44.45,5.08 0 top
U$779  [PROTOPAD-BETWEEN]  43.18,6.35 90 top
U$780  [PROTOPAD-CENTER]  44.45,6.35 0 top
U$781  PROTOPADTHT  [PROTOPAD-THT]  45.72,5.08 0 top
U$782  [PROTOPAD-BETWEEN]  46.99,5.08 0 top
U$783  [PROTOPAD-BETWEEN]  45.72,6.35 90 top
U$784  [PROTOPAD-CENTER]  46.99,6.35 0 top
U$785  PROTOPADTHT  [PROTOPAD-THT]  48.26,2.54 0 top
U$786  [PROTOPAD-BETWEEN]  49.53,2.54 0 top
U$787  [PROTOPAD-BETWEEN]  48.26,3.81 90 top
U$788  [PROTOPAD-CENTER]  49.53,3.81 0 top
U$789  PROTOPADTHT  [PROTOPAD-THT]  50.8,2.54 0 top
U$790  [PROTOPAD-BETWEEN]  52.07,2.54 0 top
U$791  [PROTOPAD-BETWEEN]  50.8,3.81 90 top
U$792  [PROTOPAD-CENTER]  52.07,3.81 0 top
U$793  PROTOPADTHT  [PROTOPAD-THT]  48.26,5.08 0 top
U$794  [PROTOPAD-BETWEEN]  49.53,5.08 0 top
U$795  [PROTOPAD-BETWEEN]  48.26,6.35 90 top
U$796  [PROTOPAD-CENTER]  49.53,6.35 0 top
U$797  PROTOPADTHT  [PROTOPAD-THT]  50.8,5.08 0 top
U$798  [PROTOPAD-BETWEEN]  52.07,5.08 0 top
U$799  [PROTOPAD-BETWEEN]  50.8,6.35 90 top
U$800  [PROTOPAD-CENTER]  52.07,6.35 0 top
U$801  PROTOPADTHT  [PROTOPAD-THT]  43.18,7.62 0 top
U$802  [PROTOPAD-BETWEEN]  44.45,7.62 0 top
U$803  [PROTOPAD-BETWEEN]  43.18,8.89 90 top
U$804  [PROTOPAD-CENTER]  44.45,8.89 0 top
U$805  PROTOPADTHT  [PROTOPAD-THT]  45.72,7.62 0 top
U$806  [PROTOPAD-BETWEEN]  46.99,7.62 0 top
U$807  [PROTOPAD-BETWEEN]  45.72,8.89 90 top
U$808  [PROTOPAD-CENTER]  46.99,8.89 0 top
U$809  PROTOPADTHT  [PROTOPAD-THT]  43.18,10.16 0 top
U$810  [PROTOPAD-BETWEEN]  44.45,10.16 0 top
U$811  [PROTOPAD-BETWEEN]  43.18,11.43 90 top
U$812  [PROTOPAD-CENTER]  44.45,11.43 0 top
U$813  PROTOPADTHT  [PROTOPAD-THT]  45.72,10.16 0 top
U$814  [PROTOPAD-BETWEEN]  46.99,10.16 0 top
U$815  [PROTOPAD-BETWEEN]  45.72,11.43 90 top
U$816  [PROTOPAD-CENTER]  46.99,11.43 0 top
U$817  PROTOPADTHT  [PROTOPAD-THT]  48.26,7.62 0 top
U$818  [PROTOPAD-BETWEEN]  49.53,7.62 0 top
U$819  [PROTOPAD-BETWEEN]  48.26,8.89 90 top
U$820  [PROTOPAD-CENTER]  49.53,8.89 0 top
U$821  PROTOPADTHT  [PROTOPAD-THT]  50.8,7.62 0 top
U$822  [PROTOPAD-BETWEEN]  52.07,7.62 0 top
U$823  [PROTOPAD-BETWEEN]  50.8,8.89 90 top
U$824  [PROTOPAD-CENTER]  52.07,8.89 0 top
U$825  PROTOPADTHT  [PROTOPAD-THT]  48.26,10.16 0 top
U$826  [PROTOPAD-BETWEEN]  49.53,10.16 0 top
U$827  [PROTOPAD-BETWEEN]  48.26,11.43 90 top
U$828  [PROTOPAD-CENTER]  49.53,11.43 0 top
U$829  PROTOPADTHT  [PROTOPAD-THT]  50.8,10.16 0 top
U$830  [PROTOPAD-BETWEEN]  52.07,10.16 0 top
U$831  [PROTOPAD-BETWEEN]  50.8,11.43 90 top
U$832  [PROTOPAD-CENTER]  52.07,11.43 0 top
U$833  PROTOPADTHT  [PROTOPAD-THT]  53.34,2.54 0 top
U$834  [PROTOPAD-BETWEEN]  54.61,2.54 0 top
U$835  [PROTOPAD-BETWEEN]  53.34,3.81 90 top
U$836  [PROTOPAD-CENTER]  54.61,3.81 0 top
U$837  PROTOPADTHT  [PROTOPAD-THT]  55.88,2.54 0 top
U$838  [PROTOPAD-BETWEEN]  57.15,2.54 0 top
U$839  [PROTOPAD-BETWEEN]  55.88,3.81 90 top
U$840  [PROTOPAD-CENTER]  57.15,3.81 0 top
U$841  PROTOPADTHT  [PROTOPAD-THT]  53.34,5.08 0 top
U$842  [PROTOPAD-BETWEEN]  54.61,5.08 0 top
U$843  [PROTOPAD-BETWEEN]  53.34,6.35 90 top
U$844  [PROTOPAD-CENTER]  54.61,6.35 0 top
U$845  PROTOPADTHT  [PROTOPAD-THT]  55.88,5.08 0 top
U$846  [PROTOPAD-BETWEEN]  57.15,5.08 0 top
U$847  [PROTOPAD-BETWEEN]  55.88,6.35 90 top
U$848  [PROTOPAD-CENTER]  57.15,6.35 0 top
U$849  PROTOPADTHT  [PROTOPAD-THT]  58.42,2.54 0 top
U$850  [PROTOPAD-BETWEEN]  59.69,2.54 0 top
U$851  [PROTOPAD-BETWEEN]  58.42,3.81 90 top
U$852  [PROTOPAD-CENTER]  59.69,3.81 0 top
U$853  PROTOPADTHT  [PROTOPAD-THT]  60.96,2.54 0 top
U$854  [PROTOPAD-BETWEEN]  62.23,2.54 0 top
U$855  [PROTOPAD-BETWEEN]  60.96,3.81 90 top
U$856  [PROTOPAD-CENTER]  62.23,3.81 0 top
U$857  PROTOPADTHT  [PROTOPAD-THT]  58.42,5.08 0 top
U$858  [PROTOPAD-BETWEEN]  59.69,5.08 0 top
U$859  [PROTOPAD-BETWEEN]  58.42,6.35 90 top
U$860  [PROTOPAD-CENTER]  59.69,6.35 0 top
U$861  PROTOPADTHT  [PROTOPAD-THT]  60.96,5.08 0 top
U$862  [PROTOPAD-BETWEEN]  62.23,5.08 0 top
U$863  [PROTOPAD-BETWEEN]  60.96,6.35 90 top
U$864  [PROTOPAD-CENTER]  62.23,6.35 0 top
U$865  PROTOPADTHT  [PROTOPAD-THT]  53.34,7.62 0 top
U$866  [PROTOPAD-BETWEEN]  54.61,7.62 0 top
U$867  [PROTOPAD-BETWEEN]  53.34,8.89 90 top
U$868  [PROTOPAD-CENTER]  54.61,8.89 0 top
U$869  PROTOPADTHT  [PROTOPAD-THT]  55.88,7.62 0 top
U$870  [PROTOPAD-BETWEEN]  57.15,7.62 0 top
U$871  [PROTOPAD-BETWEEN]  55.88,8.89 90 top
U$872  [PROTOPAD-CENTER]  57.15,8.89 0 top
U$873  PROTOPADTHT  [PROTOPAD-THT]  53.34,10.16 0 top
U$874  [PROTOPAD-BETWEEN]  54.61,10.16 0 top
U$875  [PROTOPAD-BETWEEN]  53.34,11.43 90 top
U$876  [PROTOPAD-CENTER]  54.61,11.43 0 top
U$877  PROTOPADTHT  [PROTOPAD-THT]  55.88,10.16 0 top
U$878  [PROTOPAD-BETWEEN]  57.15,10.16 0 top
U$879  [PROTOPAD-BETWEEN]  55.88,11.43 90 top
U$880  [PROTOPAD-CENTER]  57.15,11.43 0 top
U$881  PROTOPADTHT  [PROTOPAD-THT]  58.42,7.62 0 top
U$882  [PROTOPAD-BETWEEN]  59.69,7.62 0 top
U$883  [PROTOPAD-BETWEEN]  58.42,8.89 90 top
U$884  [PROTOPAD-CENTER]  59.69,8.89 0 top
U$885  PROTOPADTHT  [PROTOPAD-THT]  60.96,7.62 0 top
U$886  [PROTOPAD-BETWEEN]  62.23,7.62 0 top
U$887  [PROTOPAD-BETWEEN]  60.96,8.89 90 top
U$888  [PROTOPAD-CENTER]  62.23,8.89 0 top
U$889  PROTOPADTHT  [PROTOPAD-THT]  58.42,10.16 0 top
U$890  [PROTOPAD-BETWEEN]  59.69,10.16 0 top
U$891  [PROTOPAD-BETWEEN]  58.42,11.43 90 top
U$892  [PROTOPAD-CENTER]  59.69,11.43 0 top
U$893  PROTOPADTHT  [PROTOPAD-THT]  60.96,10.16 0 top
U$894  [PROTOPAD-BETWEEN]  62.23,10.16 0 top
U$895  [PROTOPAD-BETWEEN]  60.96,11.43 90 top
U$896  [PROTOPAD-CENTER]  62.23,11.43 0 top
U$897  PROTOPADTHT  [PROTOPAD-THT]  43.18,12.7 0 top
U$898  [PROTOPAD-BETWEEN]  44.45,12.7 0 top
U$899  [PROTOPAD-BETWEEN]  43.18,13.97 90 top
U$900  [PROTOPAD-CENTER]  44.45,13.97 0 top
U$901  PROTOPADTHT  [PROTOPAD-THT]  45.72,12.7 0 top
U$902  [PROTOPAD-BETWEEN]  46.99,12.7 0 top
U$903  [PROTOPAD-BETWEEN]  45.72,13.97 90 top
U$904  [PROTOPAD-CENTER]  46.99,13.97 0 top
U$905  PROTOPADTHT  [PROTOPAD-THT]  43.18,15.24 0 top
U$906  [PROTOPAD-BETWEEN]  44.45,15.24 0 top
U$907  [PROTOPAD-BETWEEN]  43.18,16.51 90 top
U$908  [PROTOPAD-CENTER]  44.45,16.51 0 top
U$909  PROTOPADTHT  [PROTOPAD-THT]  45.72,15.24 0 top
U$910  [PROTOPAD-BETWEEN]  46.99,15.24 0 top
U$911  [PROTOPAD-BETWEEN]  45.72,16.51 90 top
U$912  [PROTOPAD-CENTER]  46.99,16.51 0 top
U$913  PROTOPADTHT  [PROTOPAD-THT]  48.26,12.7 0 top
U$914  [PROTOPAD-BETWEEN]  49.53,12.7 0 top
U$915  [PROTOPAD-BETWEEN]  48.26,13.97 90 top
U$916  [PROTOPAD-CENTER]  49.53,13.97 0 top
U$917  PROTOPADTHT  [PROTOPAD-THT]  50.8,12.7 0 top
U$918  [PROTOPAD-BETWEEN]  52.07,12.7 0 top
U$919  [PROTOPAD-BETWEEN]  50.8,13.97 90 top
U$920  [PROTOPAD-CENTER]  52.07,13.97 0 top
U$921  PROTOPADTHT  [PROTOPAD-THT]  48.26,15.24 0 top
U$922  [PROTOPAD-BETWEEN]  49.53,15.24 0 top
U$923  [PROTOPAD-BETWEEN]  48.26,16.51 90 top
U$924  [PROTOPAD-CENTER]  49.53,16.51 0 top
U$925  PROTOPADTHT  [PROTOPAD-THT]  50.8,15.24 0 top
U$926  [PROTOPAD-BETWEEN]  52.07,15.24 0 top
U$927  [PROTOPAD-BETWEEN]  50.8,16.51 90 top
U$928  [PROTOPAD-CENTER]  52.07,16.51 0 top
U$929  PROTOPADTHT  [PROTOPAD-THT]  43.18,17.78 0 top
U$930  [PROTOPAD-BETWEEN]  44.45,17.78 0 top
U$931  [PROTOPAD-BETWEEN]  43.18,19.05 90 top
U$932  [PROTOPAD-CENTER]  44.45,19.05 0 top
U$933  PROTOPADTHT  [PROTOPAD-THT]  45.72,17.78 0 top
U$934  [PROTOPAD-BETWEEN]  46.99,17.78 0 top
U$935  [PROTOPAD-BETWEEN]  45.72,19.05 90 top
U$936  [PROTOPAD-CENTER]  46.99,19.05 0 top
U$937  PROTOPADTHT  [PROTOPAD-THT]  43.18,20.32 0 top
U$938  [PROTOPAD-BETWEEN]  44.45,20.32 0 top
U$939  [PROTOPAD-BETWEEN]  43.18,21.59 90 top
U$940  [PROTOPAD-CENTER]  44.45,21.59 0 top
U$941  PROTOPADTHT  [PROTOPAD-THT]  45.72,20.32 0 top
U$942  [PROTOPAD-BETWEEN]  46.99,20.32 0 top
U$943  [PROTOPAD-BETWEEN]  45.72,21.59 90 top
U$944  [PROTOPAD-CENTER]  46.99,21.59 0 top
U$945  PROTOPADTHT  [PROTOPAD-THT]  48.26,17.78 0 top
U$946  [PROTOPAD-BETWEEN]  49.53,17.78 0 top
U$947  [PROTOPAD-BETWEEN]  48.26,19.05 90 top
U$948  [PROTOPAD-CENTER]  49.53,19.05 0 top
U$949  PROTOPADTHT  [PROTOPAD-THT]  50.8,17.78 0 top
U$950  [PROTOPAD-BETWEEN]  52.07,17.78 0 top
U$951  [PROTOPAD-BETWEEN]  50.8,19.05 90 top
U$952  [PROTOPAD-CENTER]  52.07,19.05 0 top
U$953  PROTOPADTHT  [PROTOPAD-THT]  48.26,20.32 0 top
U$954  [PROTOPAD-BETWEEN]  49.53,20.32 0 top
U$955  [PROTOPAD-BETWEEN]  48.26,21.59 90 top
U$956  [PROTOPAD-CENTER]  49.53,21.59 0 top
U$957  PROTOPADTHT  [PROTOPAD-THT]  50.8,20.32 0 top
U$958  [PROTOPAD-BETWEEN]  52.07,20.32 0 top
U$959  [PROTOPAD-BETWEEN]  50.8,21.59 90 top
U$960  [PROTOPAD-CENTER]  52.07,21.59 0 top
U$961  PROTOPADTHT  [PROTOPAD-THT]  53.34,12.7 0 top
U$962  [PROTOPAD-BETWEEN]  54.61,12.7 0 top
U$963  [PROTOPAD-BETWEEN]  53.34,13.97 90 top
U$964  [PROTOPAD-CENTER]  54.61,13.97 0 top
U$965  PROTOPADTHT  [PROTOPAD-THT]  55.88,12.7 0 top
U$966  [PROTOPAD-BETWEEN]  57.15,12.7 0 top
U$967  [PROTOPAD-BETWEEN]  55.88,13.97 90 top
U$968  [PROTOPAD-CENTER]  57.15,13.97 0 top
U$969  PROTOPADTHT  [PROTOPAD-THT]  53.34,15.24 0 top
U$970  [PROTOPAD-BETWEEN]  54.61,15.24 0 top
U$971  [PROTOPAD-BETWEEN]  53.34,16.51 90 top
U$972  [PROTOPAD-CENTER]  54.61,16.51 0 top
U$973  PROTOPADTHT  [PROTOPAD-THT]  55.88,15.24 0 top
U$974  [PROTOPAD-BETWEEN]  57.15,15.24 0 top
U$975  [PROTOPAD-BETWEEN]  55.88,16.51 90 top
U$976  [PROTOPAD-CENTER]  57.15,16.51 0 top
U$977  PROTOPADTHT  [PROTOPAD-THT]  58.42,12.7 0 top
U$978  [PROTOPAD-BETWEEN]  59.69,12.7 0 top
U$979  [PROTOPAD-BETWEEN]  58.42,13.97 90 top
U$980  [PROTOPAD-CENTER]  59.69,13.97 0 top
U$981  PROTOPADTHT  [PROTOPAD-THT]  60.96,12.7 0 top
U$982  [PROTOPAD-BETWEEN]  62.23,12.7 0 top
U$983  [PROTOPAD-BETWEEN]  60.96,13.97 90 top
U$984  [PROTOPAD-CENTER]  62.23,13.97 0 top
U$985  PROTOPADTHT  [PROTOPAD-THT]  58.42,15.24 0 top
U$986  [PROTOPAD-BETWEEN]  59.69,15.24 0 top
U$987  [PROTOPAD-BETWEEN]  58.42,16.51 90 top
U$988  [PROTOPAD-CENTER]  59.69,16.51 0 top
U$989  PROTOPADTHT  [PROTOPAD-THT]  60.96,15.24 0 top
U$990  [PROTOPAD-BETWEEN]  62.23,15.24 0 top
U$991  [PROTOPAD-BETWEEN]  60.96,16.51 90 top
U$992  [PROTOPAD-CENTER]  62.23,16.51 0 top
U$993  PROTOPADTHT  [PROTOPAD-THT]  53.34,17.78 0 top
U$994  [PROTOPAD-BETWEEN]  54.61,17.78 0 top
U$995  [PROTOPAD-BETWEEN]  53.34,19.05 90 top
U$996  [PROTOPAD-CENTER]  54.61,19.05 0 top
U$997  PROTOPADTHT  [PROTOPAD-THT]  55.88,17.78 0 top
U$998  [PROTOPAD-BETWEEN]  57.15,17.78 0 top
U$999  [PROTOPAD-BETWEEN]  55.88,19.05 90 top
U$1000  [PROTOPAD-CENTER]  57.15,19.05 0 top
U$1001  PROTOPADTHT  [PROTOPAD-THT]  53.34,20.32 0 top
U$1002  [PROTOPAD-BETWEEN]  54.61,20.32 0 top
U$1003  [PROTOPAD-BETWEEN]  53.34,21.59 90 top
U$1004  [PROTOPAD-CENTER]  54.61,21.59 0 top
U$1005  PROTOPADTHT  [PROTOPAD-THT]  55.88,20.32 0 top
U$1006  [PROTOPAD-BETWEEN]  57.15,20.32 0 top
U$1007  [PROTOPAD-BETWEEN]  55.88,21.59 90 top
U$1008  [PROTOPAD-CENTER]  57.15,21.59 0 top
U$1009  PROTOPADTHT  [PROTOPAD-THT]  58.42,17.78 0 top
U$1010  [PROTOPAD-BETWEEN]  59.69,17.78 0 top
U$1011  [PROTOPAD-BETWEEN]  58.42,19.05 90 top
U$1012  [PROTOPAD-CENTER]  59.69,19.05 0 top
U$1013  PROTOPADTHT  [PROTOPAD-THT]  60.96,17.78 0 top
U$1014  [PROTOPAD-BETWEEN]  62.23,17.78 0 top
U$1015  [PROTOPAD-BETWEEN]  60.96,19.05 90 top
U$1016  [PROTOPAD-CENTER]  62.23,19.05 0 top
U$1017  PROTOPADTHT  [PROTOPAD-THT]  58.42,20.32 0 top
U$1018  [PROTOPAD-BETWEEN]  59.69,20.32 0 top
U$1019  [PROTOPAD-BETWEEN]  58.42,21.59 90 top
U$1020  [PROTOPAD-CENTER]  59.69,21.59 0 top
U$1021  PROTOPADTHT  [PROTOPAD-THT]  60.96,20.32 0 top
U$1022  [PROTOPAD-BETWEEN]  62.23,20.32 0 top
U$1023  [PROTOPAD-BETWEEN]  60.96,21.59 90 top
U$1024  [PROTOPAD-CENTER]  62.23,21.59 0 top
U$1025  PROTOPADTHT  [PROTOPAD-THT]  22.86,22.86 0 top
U$1026  [PROTOPAD-BETWEEN]  24.13,22.86 0 top
U$1027  [PROTOPAD-BETWEEN]  22.86,24.13 90 top
U$1028  [PROTOPAD-CENTER]  24.13,24.13 0 top
U$1029  PROTOPADTHT  [PROTOPAD-THT]  25.4,22.86 0 top
U$1030  [PROTOPAD-BETWEEN]  26.67,22.86 0 top
U$1031  [PROTOPAD-BETWEEN]  25.4,24.13 90 top
U$1032  [PROTOPAD-CENTER]  26.67,24.13 0 top
U$1033  PROTOPADTHT  [PROTOPAD-THT]  22.86,25.4 0 top
U$1034  [PROTOPAD-BETWEEN]  24.13,25.4 0 top
U$1035  [PROTOPAD-BETWEEN]  22.86,26.67 90 top
U$1036  [PROTOPAD-CENTER]  24.13,26.67 0 top
U$1037  PROTOPADTHT  [PROTOPAD-THT]  25.4,25.4 0 top
U$1038  [PROTOPAD-BETWEEN]  26.67,25.4 0 top
U$1039  [PROTOPAD-BETWEEN]  25.4,26.67 90 top
U$1040  [PROTOPAD-CENTER]  26.67,26.67 0 top
U$1041  PROTOPADTHT  [PROTOPAD-THT]  27.94,22.86 0 top
U$1042  [PROTOPAD-BETWEEN]  29.21,22.86 0 top
U$1043  [PROTOPAD-BETWEEN]  27.94,24.13 90 top
U$1044  [PROTOPAD-CENTER]  29.21,24.13 0 top
U$1045  PROTOPADTHT  [PROTOPAD-THT]  30.48,22.86 0 top
U$1046  [PROTOPAD-BETWEEN]  31.75,22.86 0 top
U$1047  [PROTOPAD-BETWEEN]  30.48,24.13 90 top
U$1048  [PROTOPAD-CENTER]  31.75,24.13 0 top
U$1049  PROTOPADTHT  [PROTOPAD-THT]  27.94,25.4 0 top
U$1050  [PROTOPAD-BETWEEN]  29.21,25.4 0 top
U$1051  [PROTOPAD-BETWEEN]  27.94,26.67 90 top
U$1052  [PROTOPAD-CENTER]  29.21,26.67 0 top
U$1053  PROTOPADTHT  [PROTOPAD-THT]  30.48,25.4 0 top
U$1054  [PROTOPAD-BETWEEN]  31.75,25.4 0 top
U$1055  [PROTOPAD-BETWEEN]  30.48,26.67 90 top
U$1056  [PROTOPAD-CENTER]  31.75,26.67 0 top
U$1057  PROTOPADTHT  [PROTOPAD-THT]  22.86,27.94 0 top
U$1058  [PROTOPAD-BETWEEN]  24.13,27.94 0 top
U$1059  [PROTOPAD-BETWEEN]  22.86,29.21 90 top
U$1060  [PROTOPAD-CENTER]  24.13,29.21 0 top
U$1061  PROTOPADTHT  [PROTOPAD-THT]  25.4,27.94 0 top
U$1062  [PROTOPAD-BETWEEN]  26.67,27.94 0 top
U$1063  [PROTOPAD-BETWEEN]  25.4,29.21 90 top
U$1064  [PROTOPAD-CENTER]  26.67,29.21 0 top
U$1065  PROTOPADTHT  [PROTOPAD-THT]  22.86,30.48 0 top
U$1066  [PROTOPAD-BETWEEN]  24.13,30.48 0 top
U$1067  [PROTOPAD-BETWEEN]  22.86,31.75 90 top
U$1068  [PROTOPAD-CENTER]  24.13,31.75 0 top
U$1069  PROTOPADTHT  [PROTOPAD-THT]  25.4,30.48 0 top
U$1070  [PROTOPAD-BETWEEN]  26.67,30.48 0 top
U$1071  [PROTOPAD-BETWEEN]  25.4,31.75 90 top
U$1072  [PROTOPAD-CENTER]  26.67,31.75 0 top
U$1073  PROTOPADTHT  [PROTOPAD-THT]  27.94,27.94 0 top
U$1074  [PROTOPAD-BETWEEN]  29.21,27.94 0 top
U$1075  [PROTOPAD-BETWEEN]  27.94,29.21 90 top
U$1076  [PROTOPAD-CENTER]  29.21,29.21 0 top